# Altium PCB PCB1.PcbDoc
Units mm, origin at the board's own origin, x right, y up, seen from the top; angles counter-clockwise.
Board outline 152.4 x 101.6 mm, 2 copper layers (Top Layer, Bottom Layer); 20 components, 33 nets, 85 pads, 19 vias.
Unrouted connection lines stored in the file: 3.
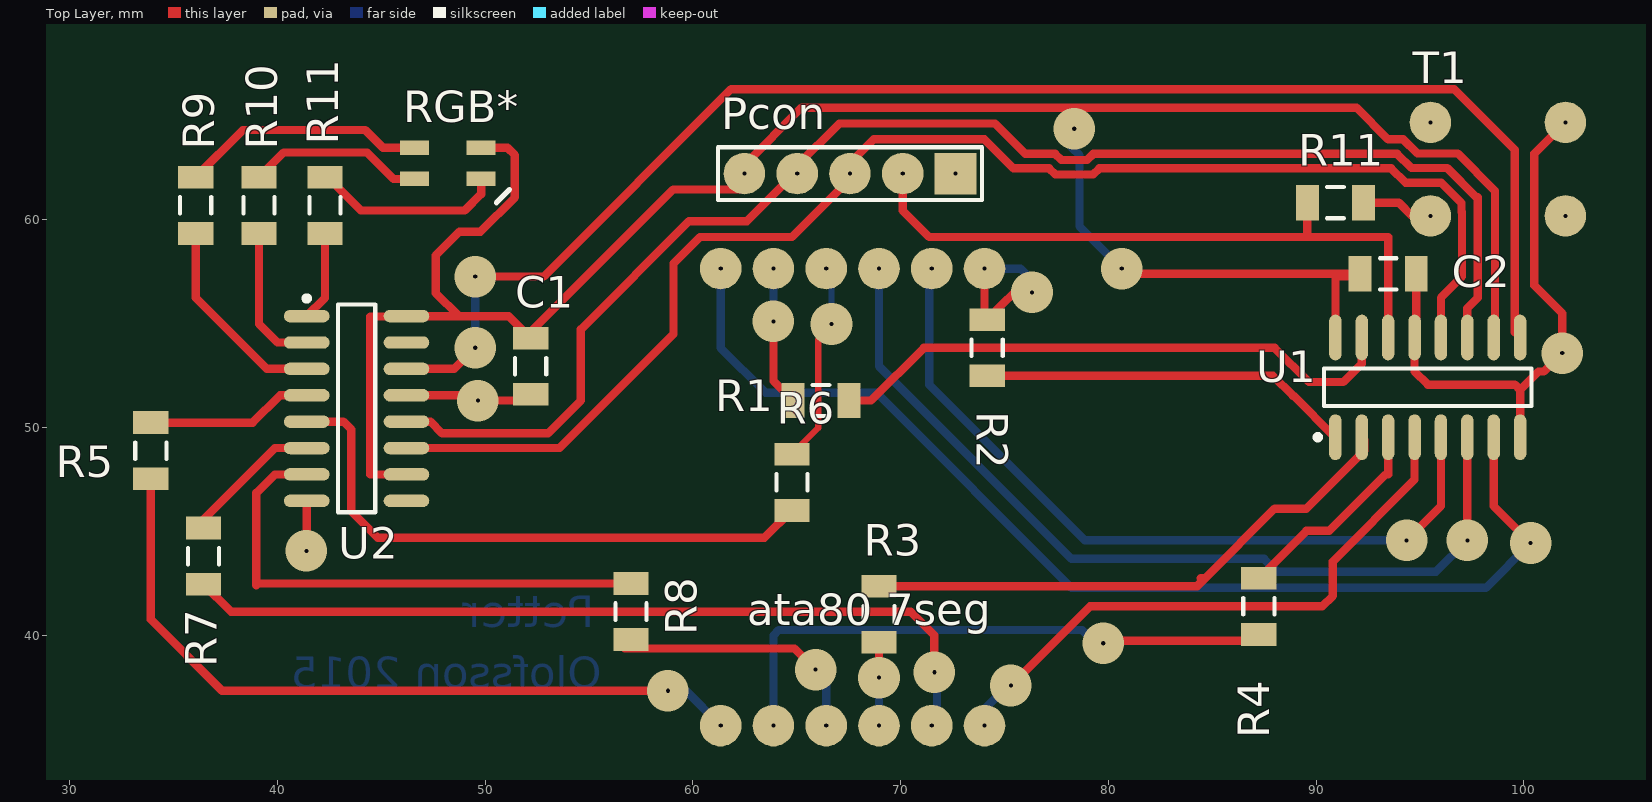
[diagram p0: Top Layer view]
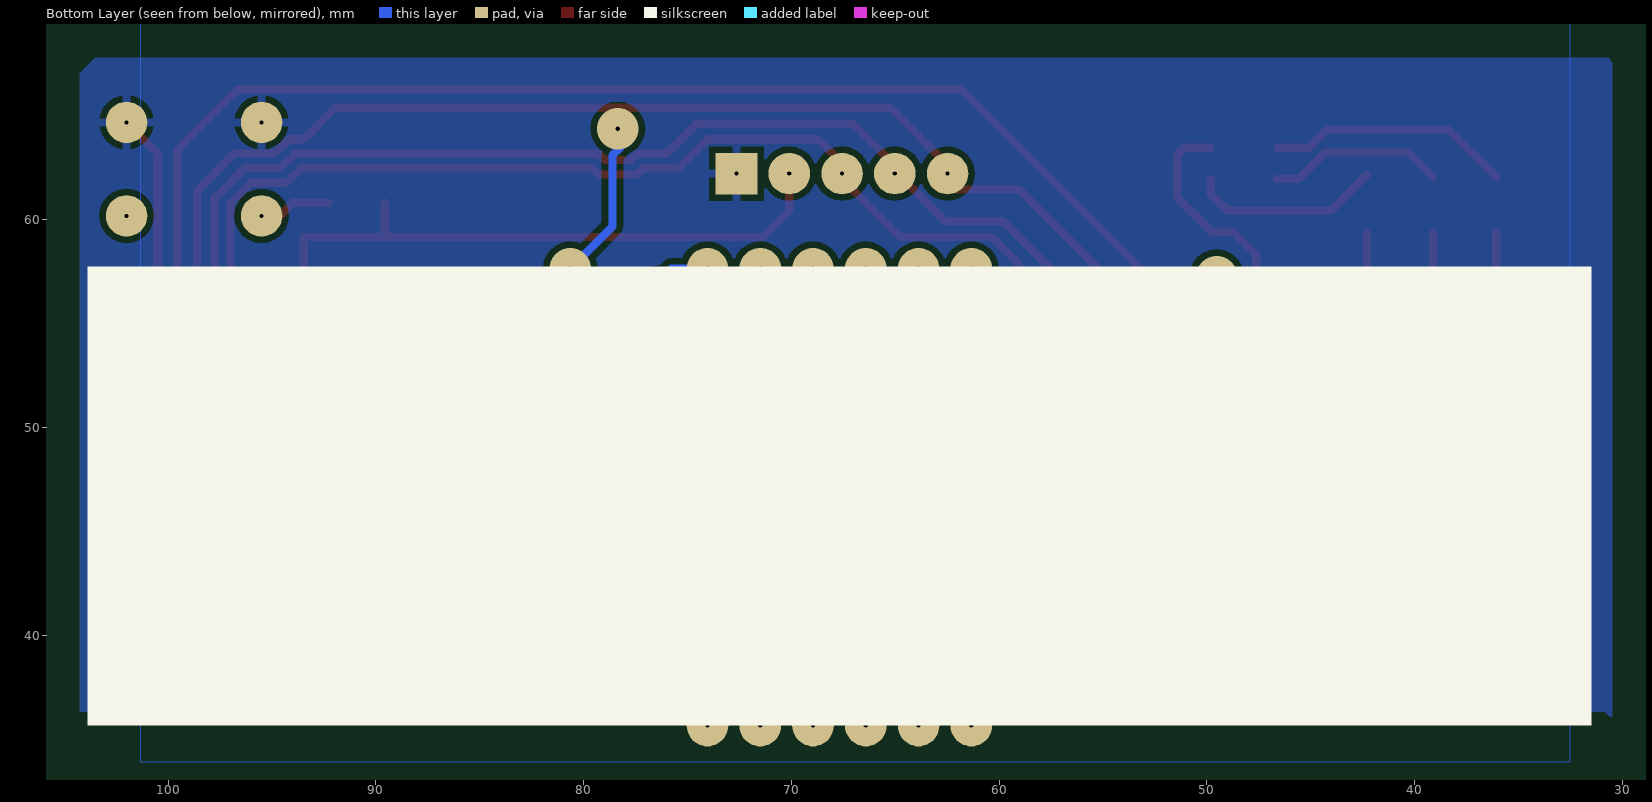
[diagram p1: Bottom Layer view, seen from below]

## Layer stack, top to bottom
Top Layer: signal copper 0.0356
Dielectric: dielectric 0.32, FR-4, Dk 4.8
Bottom Layer: signal copper 0.0356

## Board outline
25.4,25.4 177.8,25.4 177.8,127 25.4,127

## Design rules (kind name [scope] priority, off if disabled: settings)
Clearance [All] p1: gap=0.3
PlaneConnect [All] p1: planeconnectstyle=Relief reliefexpansion=0.8 reliefentries=4 reliefconductorwidth=0.6 reliefairgap=0.254
PolygonConnect [All] p1: connectstyle=Relief reliefconductorwidth=0.4 reliefentries=4 polygonreliefangle="90 Angle"
RoutingVias [All] p1: holewidth=0.2 width=2 viastyle="Through Hole" minholewidth=0.2 minwidth=1.5 maxholewidth=0.2 maxwidth=2
SilkscreenOverComponentPads [IsPad] p1: minsilkscreentomaskgap=0.254
SolderMaskExpansion [All] p1: expansion=0.102
Width [All] p1: maxlimit=1 minlimit=0.3 preferedwidth=0.4
26 further rules are at their usual default settings.

## Components (designator, comment, footprint, x,y, rotation, side; value= is the part's Value field where it differs from the comment)
"ata80 7seg" "ata80 7seg" 7seg_foot 61.341,35.658 r0 top
C1 "Cap" C1206 52.197,52.959 r90 top
C2 "Cap" C1206 93.472,57.404 r180 top (schematic designator C1)
Pcon "Header 5" HDR1X5 72.644,62.23 r180 top
R1 "Res2" C1206 66.167,51.308 r180 top
R2 "Res2" C1206 74.168,53.848 r90 top
R3 "Res2" C1206 68.961,41.021 r270 top
R4 "Res2" C1206 87.249,41.402 r270 top
R5 "Res2" C1206 33.909,48.895 r270 top
R6 "Res2" C1206 64.77,47.371 r90 top
R7 "Res2" C1206 36.449,43.815 r270 top
R8 "Res2" C1206 57.023,41.148 r270 top
R9 "Res2" C1206 36.068,60.706 r270 top
R10 "Res2" C1206 39.116,60.706 r270 top
R11 "Res2" C1206 42.291,60.706 r270 top
R11 "Res2" C1206 90.932,60.833 r0 top
RGB* "RGB_SMD" SMD_RGB 46.609,61.976 r0 top
T1 "tact_sw" pcb_sw 95.504,60.198 r0 top
U1 "M74HC595M1R" SO16_N 95.377,51.943 r90 top
U2 "M74HC595M1R" SO16_N 43.815,50.927 r0 top

## Footprints (in the part's own frame and the unit in brackets; to place one, negate y for a bottom-side part, rotate by r counter-clockwise, add the part's x,y. Pads: shape width x height; smd on the part's side, far side on the other; paste and mask are expansions set on the pad)
7seg_foot [mm]
  round 2 hole 0.2: 1(0,0) 2(2.54,0) 3(5.08,0) 4(7.62,0) 5(10.16,0) 6(12.7,0) 7(12.7,22) 8(10.16,22) 9(7.62,22) 10(5.08,22) 11(2.54,22) 12(0,22)
  body extent -29.84,-1.1 42.55,23.1, height 8
C1206 [mm] "Chip Capacitor, Body 3.2x1.6mm, IPC High Density"
  rect 1.1x1.7 smd: 1(-1.35,0) 2(1.35,0)
  silkscreen extent -0.4,-0.75 0.4,0.75, body extent -1.7,-0.9 1.7,0.9, height 1.3
HDR1X5 [mm] "Connector; Header; 5 Position"
  rect 2x2 hole 0.2: 1(0,0)
  round 2 hole 0.2: 2(2.54,0) 3(5.08,0) 4(7.62,0) 5(10.16,0)
  silkscreen extent -1.27,-1.27 11.43,1.27
pcb_sw [mm]
  round 2 hole 0.2: 1(0,0) 1(6.5,0) 2(0,4.5) 2(6.5,4.5)
SMD_RGB [mm]
  rect 1.4x0.7 smd: 1(0,0) 2(3.2,0) 3(3.2,1.5) 4(0,1.5)
  silkscreen extent 3.94,-1.14 4.57,-0.51
SO16_N [mm] "SOIC, 16-Leads, Body 9.9x3.9mm, Pitch 1.27mm, IPC Medium Density"
  oval 2.2x0.6 smd: 1(-2.4,4.445) 2(-2.4,3.175) 3(-2.4,1.905) 4(-2.4,0.635) 5(-2.4,-0.635) 6(-2.4,-1.905) 7(-2.4,-3.175) 8(-2.4,-4.445) 9(2.4,-4.445) 10(2.4,-3.175) 11(2.4,-1.905) 12(2.4,-0.635) 13(2.4,0.635) 14(2.4,1.905) 15(2.4,3.175) 16(2.4,4.445)
  silkscreen extent -2.52,-5 0.9,5.42, body extent -1.95,-4.95 1.95,4.95, height 1.75

## Part data
C1 C2: "Capacitor"
Pcon: "Header, 5-Pin"
R1 R2 R3 R4 R5 R6 R7 R8 R9 R10 R11 R11: "Resistor"
U1 U2: "8 Bit Shift Register with Output Latches (3 STATE)"

## Via types
v1: diameter 2, hole 0.2, Top Layer to Bottom Layer, 19 vias

## Nets (pads, with @x,y where several pads share a name; then routed paths per layer and width w, separated by ;. In a path a pad name is that pad's centre, name@x,y a point inside that pad or via, vN(x,y) a via of type N, cw(c..) or ccw(c..) an arc to the next point about the centre after c; other vN are vias at no path point)
B: R9.2 U2.3 | length 9.9
  Top Layer w0.4: R9.2 36.068,56.261 39.497,52.832 U2.3
C: R10.2 U2.2 | length 7
  Top Layer w0.4: R10.2 39.116,54.991 40.005,54.102 U2.2
D: R11.2@42.291,59.356 U2.1 | length 4.3
  Top Layer w0.4: U2.1 42.291,56.248 R11.2@42.291,59.356
DATA: Pcon.2 R11.1@89.582,60.833 U1.14 | length 31.4
  Top Layer w0.4: Pcon.2@70.104,61.468 70.104,60.452 71.374,59.182 89.535,59.182 ; R11.1@89.582,60.833 89.582,59.229 89.535,59.182 ; U1.14 93.472,59.182 89.535,59.182
FLAG: Pcon.3 U1.12 U2.12 | length 67.8
  Top Layer w0.4: 46.215,49.022 53.594,49.022 59.074,54.502 59.074,57.912 60.344,59.182 64.77,59.182 67.056,61.468 67.056,62.23 68.707,63.881 74.041,63.881 75.438,62.484 77.153,62.484 77.448,62.189 79.27,62.189 79.565,62.484 93.617,62.484 94.303,61.798 96.025,61.798 97.004,60.819 97.004,60.387 97.028,60.387 97.028,57.277 96.012,56.261 U1.12
GND: C1.1 C2.1 Pcon.1 T1.2 U1.8 U1.13 U2.8 U2.13 | length 36.3
  Top Layer w0.4: v1(41.402,44.069) 41.415,44.082 U2.8 ; U2.13 48.895,51.562 49.276,51.181 49.53,51.181 v1(49.657,51.308) C1.1@52.498,51.308 ; C2.1@94.822,57.277 94.822,54.423 U1.13 94.742,52.705 95.377,52.07 99.568,52.07 99.822,51.816 ; U1.8 99.822,51.816 ; T1.2@102.004,64.698 100.504,63.198 100.504,56.849 101.854,55.499 v1(101.854,53.594) 100.965,52.705 100.711,52.705 99.822,51.816
"Netata80 7seg_1": "ata80 7seg.1" R5.2 | length 36.3
  Top Layer w0.4: R5.2 33.909,40.767 37.338,37.338 v1(58.801,37.338)
  Bottom Layer w0.4: v1(58.801,37.338) 59.661,37.338 61.341,35.658
"Netata80 7seg_2": "ata80 7seg.2" R4.2 | length 28.3
  Top Layer w0.4: v1(79.756,39.624) 79.883,39.751 86.948,39.751 R4.2
  Bottom Layer w0.4: 63.881,35.658 63.881,40.005 64.135,40.259 78.74,40.259 79.375,39.624 v1(79.756,39.624)
"Netata80 7seg_3": "ata80 7seg.3" R8.2 | length 12.5
  Top Layer w0.4: R8.2@56.722,39.37 64.897,39.37 v1(65.913,38.354)
  Bottom Layer w0.4: v1(65.913,38.354) 66.421,37.846 66.421,35.658
"Netata80 7seg_4": "ata80 7seg.4" R3.2 | length 4
  Top Layer w0.4: v1(68.961,37.973) R3.2
  Bottom Layer w0.4: 68.961,35.658 v1(68.961,37.973)
"Netata80 7seg_5": "ata80 7seg.5" R7.2 | length 41.5
  Top Layer w0.4: R7.2 37.766,41.148 70.485,41.148 71.628,40.005 v1(71.628,38.227) v1@71.628,37.465
  Bottom Layer w0.4: 71.501,35.658 71.755,35.912 71.755,38.227 v1(71.628,38.227)
"Netata80 7seg_6": "ata80 7seg.6" U1.4 | length 29.3
  Top Layer w0.4: v1(75.311,37.592) 79.121,41.402 90.297,41.402 90.805,41.91 90.805,43.561 94.742,47.498 U1.4
  Bottom Layer w0.4: 74.041,35.658 74.041,36.449 75.311,37.719 v1(75.311,37.592)
"Netata80 7seg_7": "ata80 7seg.7" R2.2 | length 7.5
  Top Layer w0.4: R2.2@74.041,55.325 74.041,57.658 ; R2.2 v1@76.2,57.23
  Bottom Layer w0.4: 74.041,57.658 75.772,57.658 v1@76.2,57.23
  other v1: 76.327,56.515
"Netata80 7seg_8": "ata80 7seg.8" U1.5 | length 37.4
  Top Layer w0.4: v1(94.361,44.577) 96.012,46.228 U1.5
  Bottom Layer w0.4: 71.501,57.658 71.374,57.531 71.374,52.07 78.867,44.577 v1(94.361,44.577)
"Netata80 7seg_9": "ata80 7seg.9" U1.6 | length 42.7
  Top Layer w0.4: v1(97.282,44.577) U1.6
  Bottom Layer w0.4: 68.961,57.658 68.961,52.959 78.232,43.688 87.503,43.688 88.119,43.072 95.777,43.072 v1(97.282,44.577)
"Netata80 7seg_10": "ata80 7seg.10" R6.2 | length 9.8
  Top Layer w0.3: R6.2 66.04,49.991 66.04,54.229 66.675,54.864 v1(66.675,54.991)
  Bottom Layer w0.3: 66.421,57.658 66.675,57.404 v1(66.675,54.991)
"Netata80 7seg_11": "ata80 7seg.11" R1.2 | length 6.9
  Top Layer w0.4: 63.754,57.785 63.881,57.658 ; v1(63.881,55.118) 63.881,52.244 R1.2
  Bottom Layer w0.4: v1(63.881,55.118) 63.881,57.658
"Netata80 7seg_12": "ata80 7seg.12" U1.7 | length 54.3
  Top Layer w0.4: U1.7 98.552,46.228 v1(100.33,44.45)
  Bottom Layer w0.4: 61.341,57.658 61.341,53.848 63.5,51.689 68.834,51.689 78.232,42.291 98.171,42.291 v1(100.33,44.45)
NetR1_1: R1.1 U1.15 | length 28
  Top Layer w0.4: R1.1 68.58,51.308 71.12,53.848 88.011,53.848 89.662,52.197 91.313,52.197 92.202,53.086 U1.15
NetR2_1: R2.1 U1.1 | length 18
  Top Layer w0.4: R2.1 87.928,52.498 88.883,51.543 88.906,51.543 90.919,49.53 U1.1
NetR3_1: R3.1 U1.2 | length 27
  Top Layer w0.4: R3.1 84.281,42.371 84.662,42.752 ; 84.455,42.752 84.662,42.752 ; U1.2 92.329,49.416 92.329,48.895 89.535,46.101 88.011,46.101 84.662,42.752
NetR4_1: R4.1 U1.3 | length 10.7
  Top Layer w0.4: R4.1@87.837,42.752 R4.1 89.535,45.038 90.631,45.038 93.345,47.752 93.472,47.752 U1.3
NetR5_1: R5.1 U2.4 | length 8.1
  Top Layer w0.4: R5.1 38.815,50.245 40.132,51.562 U2.4
NetR6_1: R6.1 U2.5 | length 28.5
  Top Layer w0.4: U2.5 43.18,50.292 43.561,49.911 43.561,45.974 44.831,44.704 63.453,44.704 R6.1
NetR7_1: R7.1 U2.6 | length 6.8
  Top Layer w0.4: R7.1 36.449,45.593 39.878,49.022 U2.6
NetR8_1: R8.1 U2.7 | length 25.3
  Top Layer w0.4: U2.7 39.878,47.752 38.989,46.863 38.989,42.418 39.069,42.498 R8.1
NetR9_1: R9.1 RGB*.4 | length 11.8
  Top Layer w0.4: R9.1 38.339,64.327 44.232,64.327 45.083,63.476 RGB*.4
NetR10_1: R10.1 RGB*.1 | length 8.5
  Top Layer w0.4: R10.1 40.306,63.246 44.323,63.246 45.593,61.976 RGB*.1
NetR11_1: R11.1@42.291,62.056 RGB*.2 | length 9.3
  Top Layer w0.4: R11.1@42.291,62.183 44.022,60.452 49.022,60.452 49.809,61.239 RGB*.2
NetR11_2: R11.2@92.282,60.833 T1.1 | length 3.5
  Top Layer w0.4: R11.2@92.282,60.833 93.98,60.833 94.615,60.198 T1.1@95.504,60.198
NetU1_9: U1.9 U2.14 | length 71.3
  Top Layer w0.4: U2.14 48.514,52.832 v1(49.53,53.848) ; v1(49.53,57.277) 52.832,57.277 61.849,66.294 96.647,66.294 99.568,63.373 99.568,54.597 U1.9
  Bottom Layer w0.4: v1(49.53,53.848) v1(49.53,57.277)
SHIFT_C: Pcon.4 U1.11 U2.11 | length 68.8
  Top Layer w0.4: 46.215,50.292 47.371,50.292 47.936,49.727 53.029,49.727 54.61,51.308 54.61,54.737 59.817,59.944 62.611,59.944 65.024,62.357 65.024,62.611 67.056,64.643 74.549,64.643 76.008,63.184 77.443,63.184 77.738,62.889 78.98,62.889 79.275,63.184 93.907,63.184 94.593,62.498 96.315,62.498 97.704,61.109 97.704,61.087 97.79,61.087 97.79,56.261 97.282,55.753 U1.11
VCC: C1.2 C2.2 Pcon.5 RGB*.3 U1.10 U1.16 U2.10 U2.16 | length 112.6
  Top Layer w0.4: U2.10 44.469,47.752 44.469,55.353 46.196,55.353 U2.16 48.736,55.372 ; RGB*.3 51.078,63.476 51.435,63.119 51.435,61.087 49.784,59.436 48.768,59.436 47.625,58.293 47.625,56.483 48.736,55.372 ; v1@80.645,57.404 C2.2 C2.2@92.202,57.404 ; U1.16 90.932,57.15 ; 91.059,57.277 C2.2@92.122,57.277 ; U1.10 98.617,54.408 98.617,61.403 96.822,63.198 94.883,63.198 94.197,63.884 93.469,63.884 91.948,65.405 65.24,65.405 62.484,62.649 Pcon.5 62.484,61.468 59.055,61.468 52.197,54.61 C1.2 51.134,55.372 48.736,55.372
  Bottom Layer w0.4: v1@78.232,63.5 78.613,63.119 78.613,59.69 v1(80.645,57.658)
  other v1: 78.359,64.389
pads on no net: U2.9 U2.15

## Polygon pours and split planes (outlines as drawn)
GND on Bottom Layer "Top Layer-No Net" (solid, shelved, pour order 2): 101.854,79.121 101.346,78.613 101.346,33.909 32.512,33.909 32.512,79.121
GND on Bottom Layer "Top Layer-No Net 1" (solid, pour order 3): 30.607,67.691 30.48,67.564 30.48,35.941 30.861,36.322 104.267,36.322 104.267,67.056 103.505,67.818 30.48,67.818

## Other copper
Bottom Layer:
  text "Petter" at 55.245,40.386 h1.52
  text "Olofsson 2015" at 55.626,37.465 h1.52